# EAGLE board alu4 (EAGLE 9.5.1), part 1 of 2
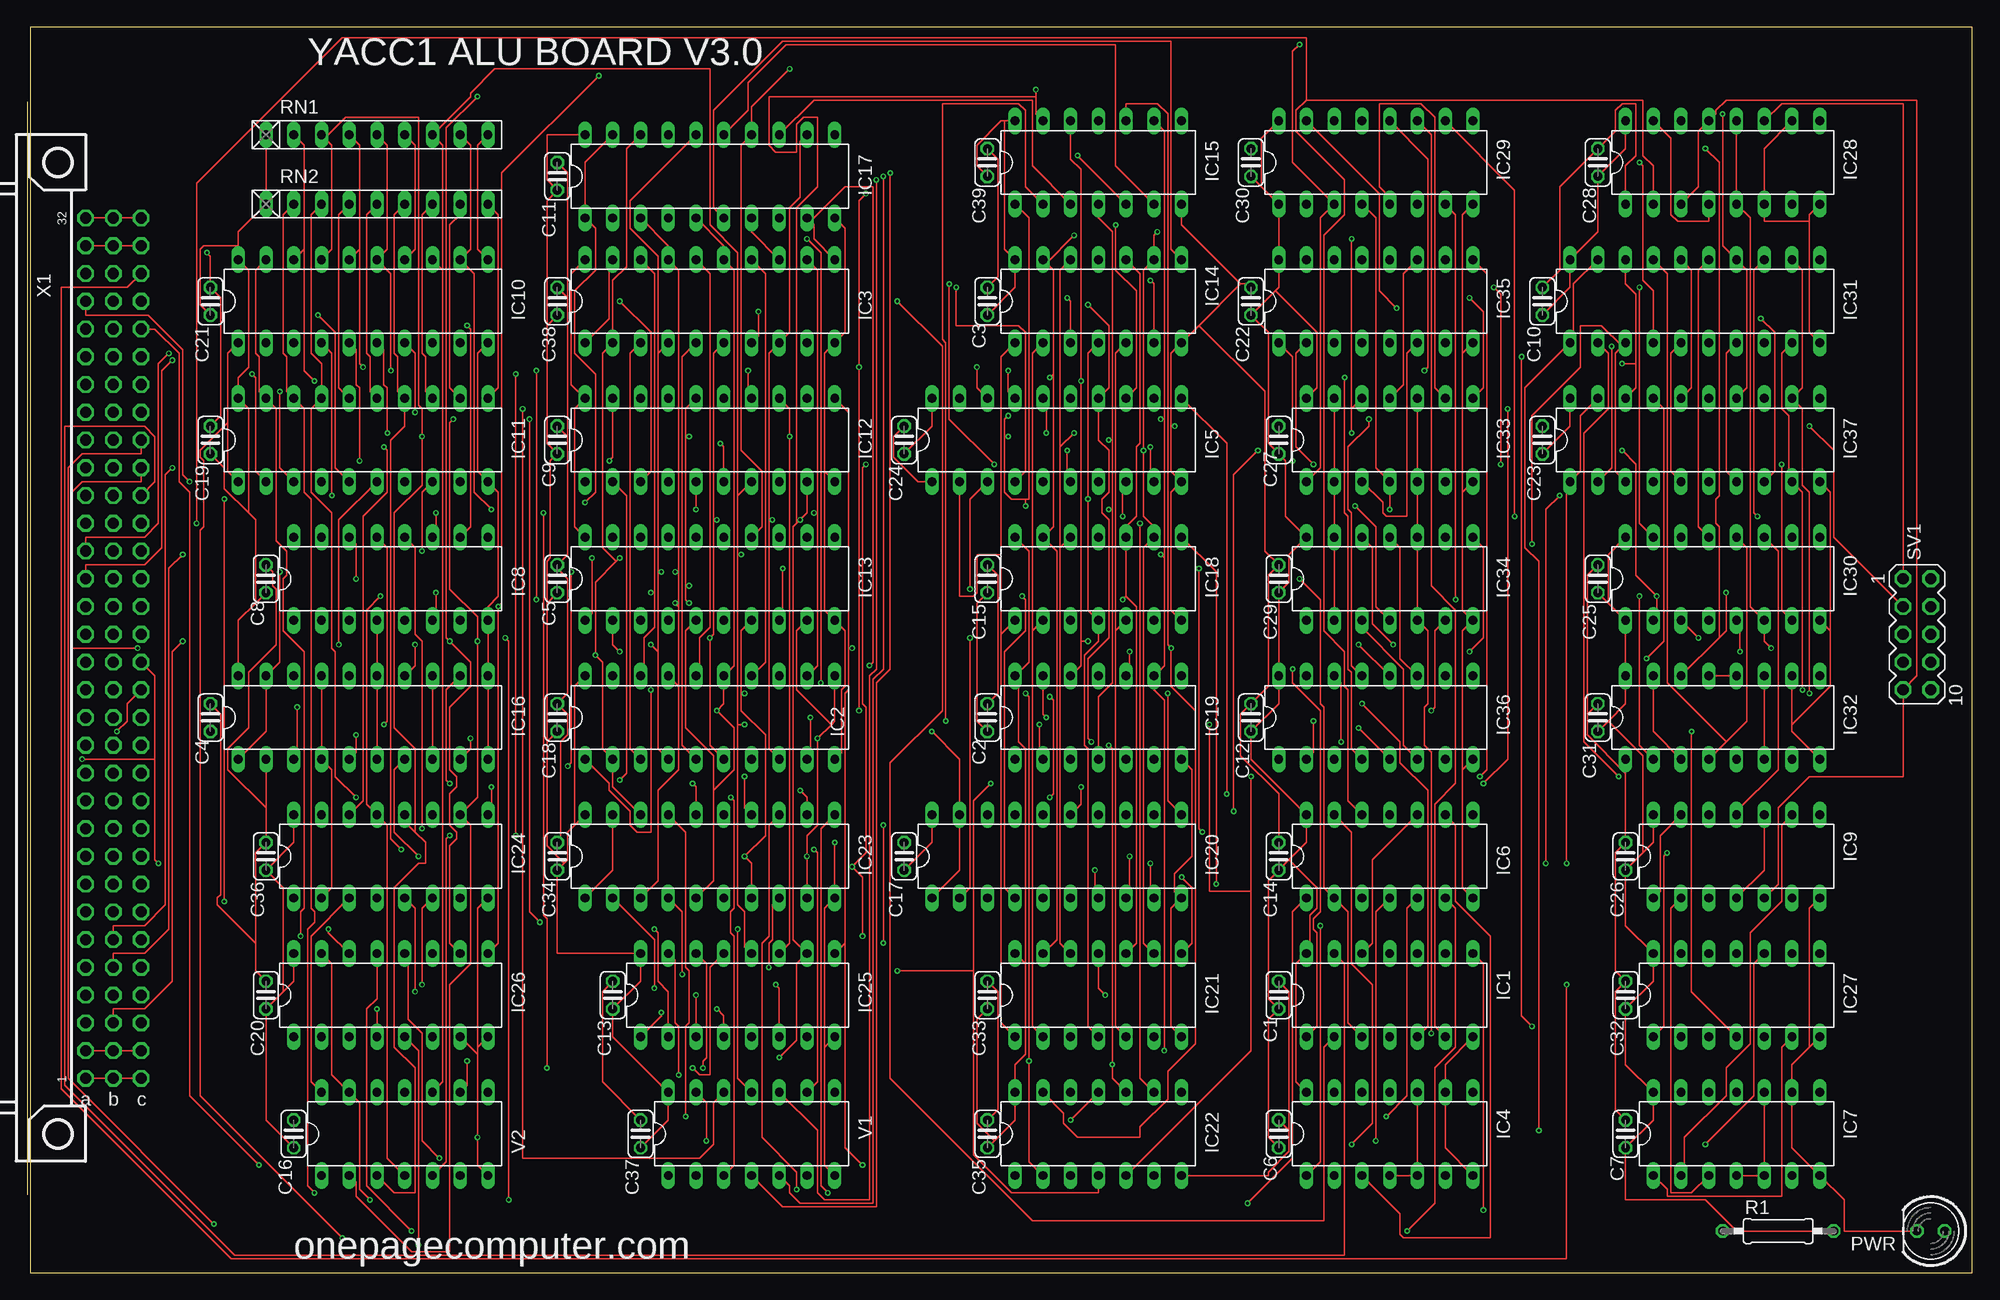
[diagram p0: board, top side]
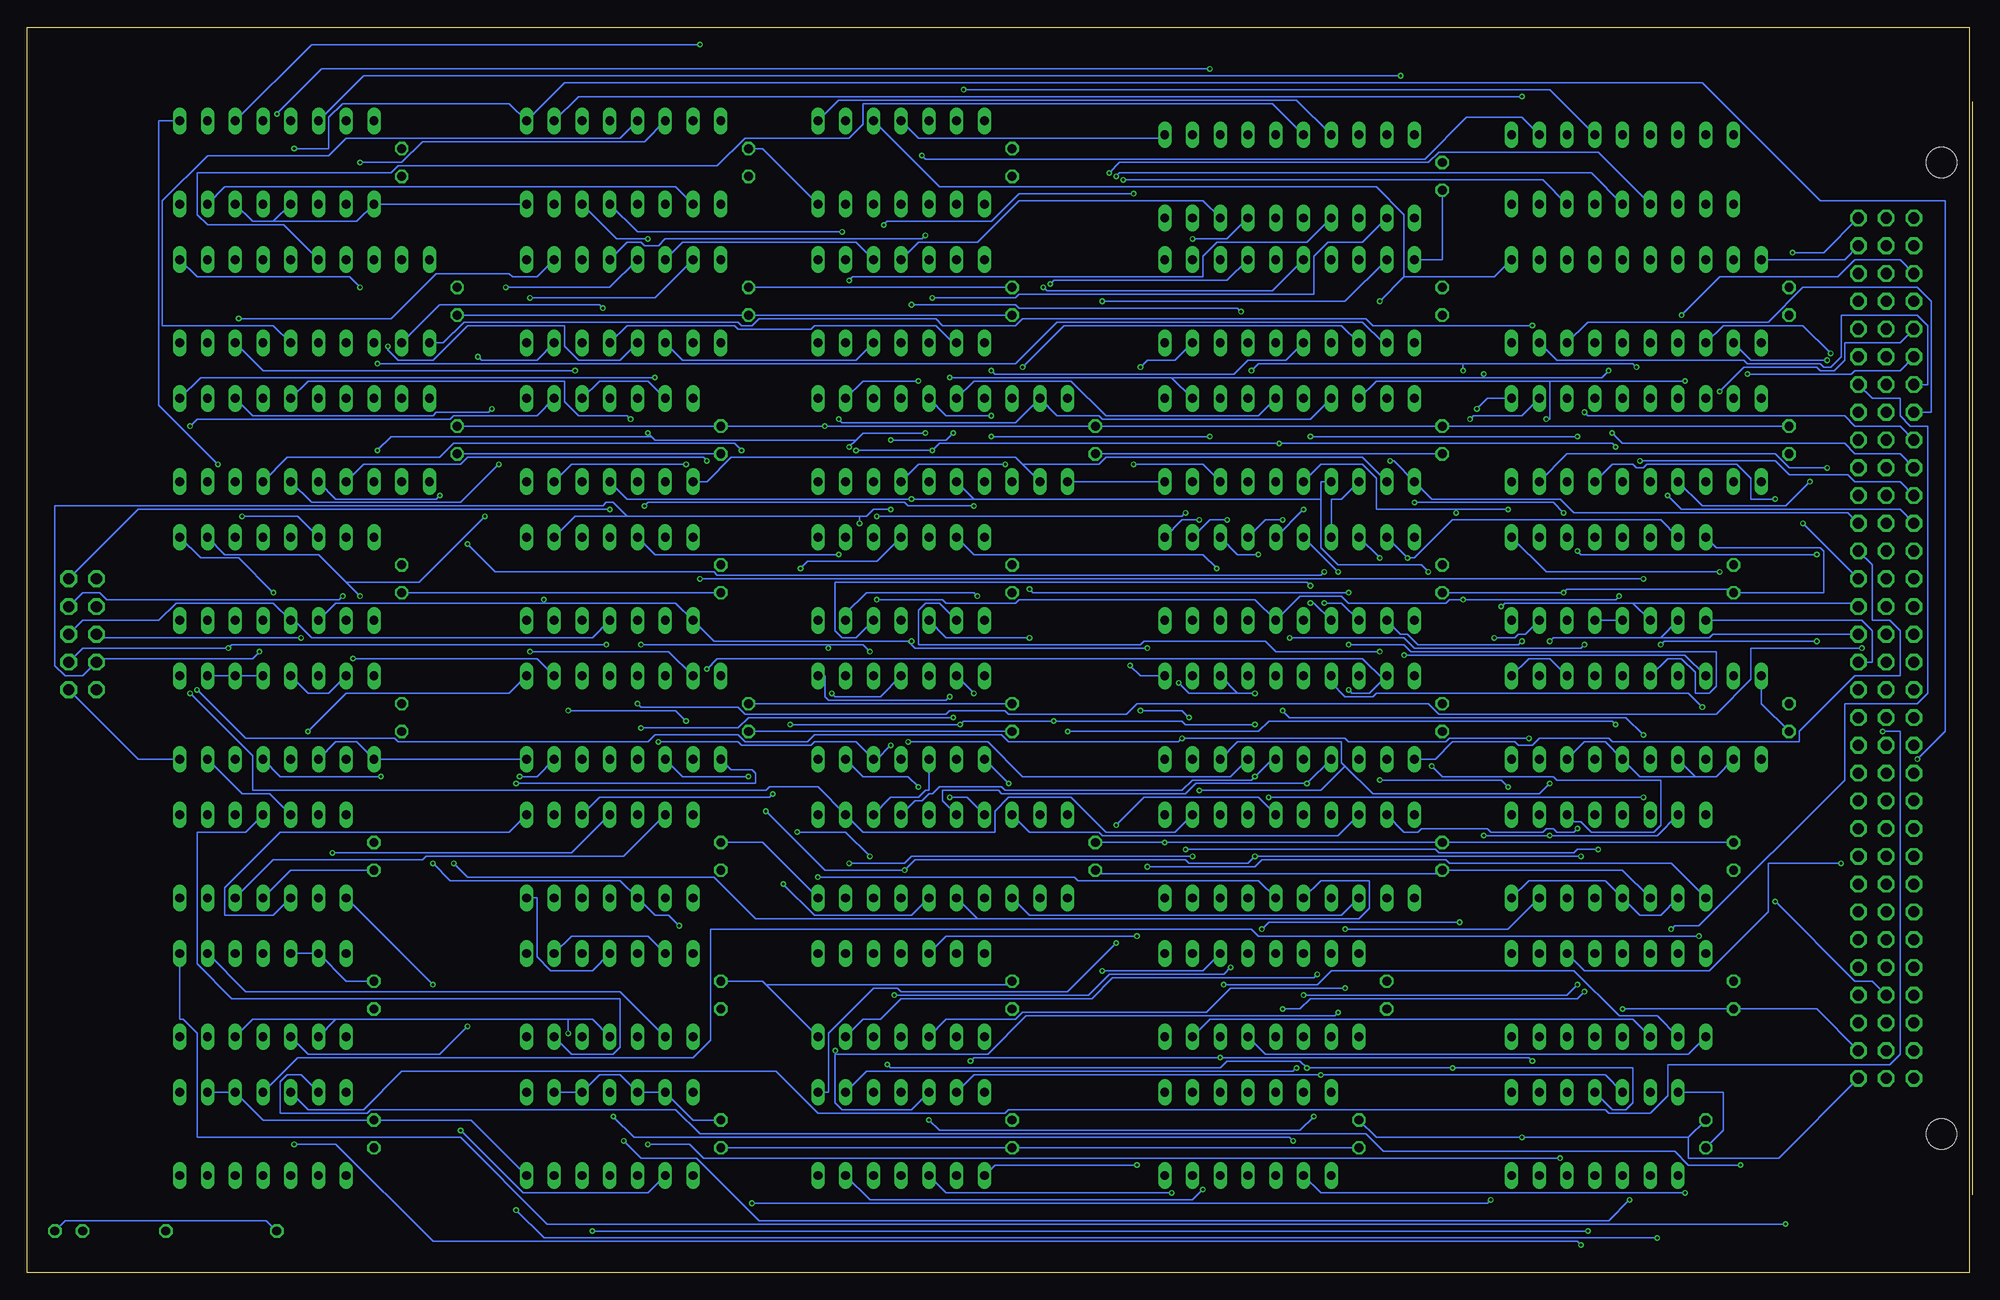
[diagram p1: board, bottom side, seen from below]

Size 177.78 x 113.97 mm. Coordinates in mm from the lower left corner, seen from the top.
Outline: 0,0 177.78,0 177.78,113.97 0,113.97 0,0
Copper layers (1*16): Top 0.035559375mm / dielectric 1.6mm / Bottom 0.035559375mm
Design rules "oshpark-2layer": minimum track width 6mil, minimum drill 10mil, track to track 6mil, track to pad 6mil, pad to pad 6mil, via to via 6mil, smd to smd 6mil, copper to edge 15mil, drill to drill 6mil, minimum pad ring 5mil, minimum via ring 5mil, stop-mask expansion 2.5mil, vias tented up to drill 0mil, thermal gap 10mil

## Footprints (pad centres in the part's own frame; a part is rotated, then mirrored left to right if it is on the bottom)
C025-024X044 = drill 0.813 octagon: 1 -1.27,0; 2 1.27,0
DIL14 = drill 0.813 long: 1 -7.62,-3.81; 2 -5.08,-3.81; 3 -2.54,-3.81; 4 0,-3.81; 5 2.54,-3.81; 6 5.08,-3.81; 7 7.62,-3.81; 8 7.62,3.81; 9 5.08,3.81; 10 2.54,3.81; 11 0,3.81; 12 -2.54,3.81; 13 -5.08,3.81; 14 -7.62,3.81
DIL20 = drill 0.813 long: 1 -11.43,-3.81; 2 -8.89,-3.81; 3 -6.35,-3.81; 4 -3.81,-3.81; 5 -1.27,-3.81; 6 1.27,-3.81; 7 3.81,-3.81; 8 6.35,-3.81; 9 8.89,-3.81; 10 11.43,-3.81; 11 11.43,3.81; 12 8.89,3.81; 13 6.35,3.81; 14 3.81,3.81; 15 1.27,3.81; 16 -1.27,3.81; 17 -3.81,3.81; 18 -6.35,3.81; 19 -8.89,3.81; 20 -11.43,3.81
DIL16 = drill 0.813 long: 1 -8.89,-3.81; 2 -6.35,-3.81; 3 -3.81,-3.81; 4 -1.27,-3.81; 5 1.27,-3.81; 6 3.81,-3.81; 7 6.35,-3.81; 8 8.89,-3.81; 9 8.89,3.81; 10 6.35,3.81; 11 3.81,3.81; 12 1.27,3.81; 13 -1.27,3.81; 14 -3.81,3.81; 15 -6.35,3.81; 16 -8.89,3.81
LED5MM = drill 0.813 octagon: A -1.27,0; K 1.27,0
0207/10 = drill 0.813 octagon: 1 -5.08,0; 2 5.08,0
RN-9 = drill 0.813 long: 1 -10.16,0; 2 -7.62,0; 3 -5.08,0; 4 -2.54,0; 5 0,0; 6 2.54,0; 7 5.08,0; 8 7.62,0; 9 10.16,0
MA05-2 = drill 1.016 octagon: 1 -5.08,-1.27; 2 -5.08,1.27; 3 -2.54,-1.27; 4 -2.54,1.27; 5 0,-1.27; 6 0,1.27; 7 2.54,-1.27; 8 2.54,1.27; 9 5.08,-1.27; 10 5.08,1.27
FABC96R = drill 1.016 octagon: A1 -2.54,39.37; A2 -2.54,36.83; A3 -2.54,34.29; A4 -2.54,31.75; A5 -2.54,29.21; A6 -2.54,26.67; A7 -2.54,24.13; A8 -2.54,21.59; A9 -2.54,19.05; A10 -2.54,16.51; A11 -2.54,13.97; A12 -2.54,11.43; A13 -2.54,8.89; A14 -2.54,6.35; A15 -2.54,3.81; A16 -2.54,1.27; A17 -2.54,-1.27; A18 -2.54,-3.81; A19 -2.54,-6.35; A20 -2.54,-8.89; A21 -2.54,-11.43; A22 -2.54,-13.97; A23 -2.54,-16.51; A24 -2.54,-19.05; A25 -2.54,-21.59; A26 -2.54,-24.13; A27 -2.54,-26.67; A28 -2.54,-29.21; A29 -2.54,-31.75; A30 -2.54,-34.29; A31 -2.54,-36.83; A32 -2.54,-39.37; B1 -5.08,39.37; B2 -5.08,36.83; B3 -5.08,34.29; B4 -5.08,31.75; B5 -5.08,29.21; B6 -5.08,26.67; B7 -5.08,24.13; B8 -5.08,21.59; B9 -5.08,19.05; B10 -5.08,16.51; B11 -5.08,13.97; B12 -5.08,11.43; B13 -5.08,8.89; B14 -5.08,6.35; B15 -5.08,3.81; B16 -5.08,1.27; B17 -5.08,-1.27; B18 -5.08,-3.81; B19 -5.08,-6.35; B20 -5.08,-8.89; B21 -5.08,-11.43; B22 -5.08,-13.97; B23 -5.08,-16.51; B24 -5.08,-19.05; B25 -5.08,-21.59; B26 -5.08,-24.13; B27 -5.08,-26.67; B28 -5.08,-29.21; B29 -5.08,-31.75; B30 -5.08,-34.29; B31 -5.08,-36.83; B32 -5.08,-39.37; C1 -7.62,39.37; C2 -7.62,36.83; C3 -7.62,34.29; C4 -7.62,31.75; C5 -7.62,29.21; C6 -7.62,26.67; C7 -7.62,24.13; C8 -7.62,21.59; C9 -7.62,19.05; C10 -7.62,16.51; C11 -7.62,13.97; C12 -7.62,11.43; C13 -7.62,8.89; C14 -7.62,6.35; C15 -7.62,3.81; C16 -7.62,1.27; C17 -7.62,-1.27; C18 -7.62,-3.81; C19 -7.62,-6.35; C20 -7.62,-8.89; C21 -7.62,-11.43; C22 -7.62,-13.97; C23 -7.62,-16.51; C24 -7.62,-19.05; C25 -7.62,-21.59; C26 -7.62,-24.13; C27 -7.62,-26.67; C28 -7.62,-29.21; C29 -7.62,-31.75; C30 -7.62,-34.29; C31 -7.62,-36.83; C32 -7.62,-39.37 | hole 2.794: 0,-44.456; 0,44.456

## Placement (x,y rotation side)
C1  .1uf  [C025-024X044]  114.3,25.4 90 top
C2  .1uf  [C025-024X044]  87.63,50.8 90 top
C3  .1uf  [C025-024X044]  87.63,88.9 90 top
C4  .1uf  [C025-024X044]  16.51,50.8 90 top
C5  .1uf  [C025-024X044]  48.26,63.5 90 top
C6  .1uf  [C025-024X044]  114.3,12.7 90 top
C7  .1uf  [C025-024X044]  146.05,12.7 90 top
C8  .1uf  [C025-024X044]  21.59,63.5 90 top
C9  .1uf  [C025-024X044]  48.26,76.2 90 top
C10  .1uf  [C025-024X044]  138.43,88.9 90 top
C11  .1uf  [C025-024X044]  48.26,100.33 90 top
C12  .1uf  [C025-024X044]  111.76,50.8 90 top
C13  .1uf  [C025-024X044]  53.34,25.4 90 top
C14  .1uf  [C025-024X044]  114.3,38.1 90 top
C15  .1uf  [C025-024X044]  87.63,63.5 90 top
C16  .1uf  [C025-024X044]  24.13,12.7 90 top
C17  .1uf  [C025-024X044]  80.01,38.1 90 top
C18  .1uf  [C025-024X044]  48.26,50.8 90 top
C19  .1uf  [C025-024X044]  16.51,76.2 90 top
C20  .1uf  [C025-024X044]  21.59,25.4 90 top
C21  ,1uf  [C025-024X044]  16.51,88.9 90 top
C22  .1uf  [C025-024X044]  111.76,88.9 90 top
C23  .1uf  [C025-024X044]  138.43,76.2 90 top
C24  .1uf  [C025-024X044]  80.01,76.2 90 top
C25  .1uf  [C025-024X044]  143.51,63.5 90 top
C26  .1uf  [C025-024X044]  146.05,38.1 90 top
C27  .1uf  [C025-024X044]  114.3,76.2 90 top
C28  .1uf  [C025-024X044]  143.51,101.6 90 top
C29  .1uf  [C025-024X044]  114.3,63.5 90 top
C30  .1uf  [C025-024X044]  111.76,101.6 90 top
C31  .1uf  [C025-024X044]  143.51,50.8 90 top
C32  .1uf  [C025-024X044]  146.05,25.4 90 top
C33  .1uf  [C025-024X044]  87.63,25.4 90 top
C34  .1uf  [C025-024X044]  48.26,38.1 90 top
C35  .1uf  [C025-024X044]  87.63,12.7 90 top
C36  .1uf  [C025-024X044]  21.59,38.1 90 top
C37  .1uf  [C025-024X044]  55.88,12.7 90 top
C38  .1uf  [C025-024X044]  48.26,88.9 90 top
C39  .1uf  [C025-024X044]  87.63,101.6 90 top
IC1  74ALS04N  [DIL14]  124.46,25.4 0 top
IC2  74LS240N  [DIL20]  62.23,50.8 0 top
IC3  74LS244N  [DIL20]  62.23,88.9 0 top
IC4  74LS00N  [DIL14]  124.46,12.7 0 top
IC5  74LS374N  [DIL20]  93.98,76.2 0 top
IC6  74ALS08N  [DIL14]  124.46,38.1 0 top
IC7  74LS32N  [DIL14]  156.21,12.7 0 top
IC8  74LS138N  [DIL16]  33.02,63.5 0 top
IC9  74LS74N  [DIL14]  156.21,38.1 0 top
IC10  74LS245N  [DIL20]  30.48,88.9 0 top
IC11  74LS245N  [DIL20]  30.48,76.2 0 top
IC12  74LS244N  [DIL20]  62.23,76.2 0 top
IC13  74LS244N  [DIL20]  62.23,63.5 0 top
IC14  74LS86N  [DIL14]  97.79,88.9 0 top
IC15  74LS86N  [DIL14]  97.79,101.6 0 top
IC16  74LS244N  [DIL20]  30.48,50.8 0 top
IC17  74LS244N  [DIL20]  62.23,100.33 0 top
IC18  74LS08N  [DIL14]  97.79,63.5 0 top
IC19  74LS08N  [DIL14]  97.79,50.8 0 top
IC20  74LS244N  [DIL20]  93.98,38.1 0 top
IC21  74LS32N  [DIL14]  97.79,25.4 0 top
IC22  74LS32N  [DIL14]  97.79,12.7 0 top
IC23  74LS244N  [DIL20]  62.23,38.1 0 top
IC24  74LS85N  [DIL16]  33.02,38.1 0 top
IC25  74LS85N  [DIL16]  64.77,25.4 0 top
IC26  74LS251N  [DIL16]  33.02,25.4 0 top
IC27  74LS86N  [DIL14]  156.21,25.4 0 top
IC28  74LS153N  [DIL16]  154.94,101.6 0 top
IC29  74LS194N  [DIL16]  123.19,101.6 0 top
IC30  74LS194N  [DIL16]  154.94,63.5 0 top
IC31  74LS244N  [DIL20]  152.4,88.9 0 top
IC32  74LS153N  [DIL16]  154.94,50.8 0 top
IC33  74LS86N  [DIL14]  124.46,76.2 0 top
IC34  74LS86N  [DIL14]  124.46,63.5 0 top
IC35  74LS283N  [DIL16]  123.19,88.9 0 top
IC36  74LS283N  [DIL16]  123.19,50.8 0 top
IC37  74LS244N  [DIL20]  152.4,76.2 0 top
PWR  [LED5MM]  173.99,3.81 180 top
R1  330  [0207/10]  160.02,3.81 0 top
RN1  10k  [RN-9]  31.75,104.14 0 top
RN2  10k  [RN-9]  31.75,97.79 0 top
SV1  [MA05-2]  172.72,58.42 270 top
V1  744078N  [DIL14]  66.04,12.7 0 top
V2  744078N  [DIL14]  34.29,12.7 0 top
X1  FABC96R  [FABC96R]  2.54,57.15 180 top

## Library data of the parts
C1-C39 = rcl
IC1-IC37 = 74xx-us
PWR = led
R1 = eagle-ltspice; SPICEMODEL: NONE; SPICEPREFIX: R
RN1 RN2 = resistor-net; OC_FARNELL: unknown; OC_NEWARK: unknown
SV1 = con-lstb; OC_FARNELL: unknown; OC_NEWARK: unknown
V1 V2 = 74ttl-din
X1 = con-vg

## Nets
-AC-LD: IC1.9 IC1.13 X1.C22
-AC-LD-INV: IC1.1 IC2.1 IC2.19 X1.C20
-AC-RD: IC12.1 IC12.19 X1.C21
-ADD: IC6.1 IC8.7
-ADD/SUB: IC4.1 IC6.3 IC37.1 IC37.19
-ADDR-REG-LD0: X1.C4
-ADDR-REG-LD1: X1.C6
-ADDR-REG-RD0: X1.C3
-ADDR-REG-RD1: X1.C5
-ALU-FUNC: IC7.12 X1.C15
-ALU-IO-EN: IC7.11 IC10.19 IC11.19
-AND: IC8.13 IC20.1 IC20.19
-BUS-EN: IC7.13 X1.C28
-BUS-OUT: IC1.8 IC10.1 IC11.1
-DATA: IC8.15 IC13.1 IC13.19
-HL-SWAP: X1.C25
-IN: IC26.14 X1.C26
-INT: X1.C13
-INTA: X1.C14
-IO-ADDR-LD: X1.C11
-IO-RD: X1.B25
-IO-WR: X1.B26
-MEM-RD: X1.B23
-MEM-WR: X1.B24
-OR: IC8.12 IC23.1 IC23.19
-OUT: X1.C27
-REG-DN: X1.B21
-REG-FUNC-LD: X1.B8
-REG-FUNC-RD: X1.B7
-REG-LD-HI: X1.B20
-REG-LD-LO: X1.B18
-REG-RD-HI: X1.B19
-REG-RD-LO: X1.B17
-REG-UP: X1.B22
-RESET: IC9.1 IC9.13 X1.C30
-RUN: X1.C29
-SHIFT: IC4.2 IC8.10 IC31.1 IC31.19
-SR-LD: IC1.5 X1.C23
-SUB: IC1.3 IC6.2 IC8.14
-TMP-REG-LD0: X1.B28
-TMP-REG-LD1: X1.B30
-TMP-REG-RD0: X1.B27
-TMP-REG-RD1: X1.B29
-XOR: IC8.11 IC17.1 IC17.19
-ZERO: IC8.9 IC16.1 IC16.19
AC-LD: IC1.12 IC5.11 IC6.10
AC-LD-INV: IC1.2 IC3.1 IC3.19 IC27.9
ACI-DATA0: IC2.18 IC3.18 IC5.3
ACI-DATA1: IC2.16 IC3.16 IC5.4
ACI-DATA2: IC2.14 IC3.14 IC5.7
ACI-DATA3: IC2.12 IC3.12 IC5.8
ACI-DATA4: IC2.9 IC3.9 IC5.13
ACI-DATA5: IC2.7 IC3.7 IC5.14
ACI-DATA6: IC2.5 IC3.5 IC5.17
ACI-DATA7: IC2.3 IC3.3 IC5.18
ACO-DATA0: IC5.2 IC12.2 IC14.1 IC18.1 IC21.1 IC24.9 IC28.11 IC29.3 IC33.1 SV1.1
ACO-DATA1: IC5.5 IC12.4 IC14.4 IC18.4 IC21.4 IC24.11 IC29.4 IC33.4 SV1.2
ACO-DATA2: IC5.6 IC12.6 IC14.9 IC18.9 IC21.9 IC24.14 IC29.5 IC33.9 SV1.3
ACO-DATA3: IC5.9 IC12.8 IC14.12 IC18.12 IC21.12 IC24.1 IC29.6 IC30.2 IC33.12 SV1.4
ACO-DATA4: IC5.12 IC12.11 IC15.12 IC19.12 IC22.1 IC25.9 IC29.7 IC30.3 IC34.1 SV1.5
ACO-DATA5: IC5.15 IC12.13 IC15.1 IC19.1 IC22.4 IC25.11 IC30.4 IC34.4 SV1.6
ACO-DATA6: IC5.16 IC12.15 IC15.4 IC19.4 IC22.9 IC25.14 IC30.5 IC34.9 SV1.7
ACO-DATA7: IC5.19 IC12.17 IC15.9 IC19.9 IC22.12 IC25.1 IC28.5 IC28.12 IC30.6 IC34.12 SV1.8
ADDR0: X1.A3
ADDR1: X1.A4
ADDR2: X1.A5
ADDR3: X1.A6
ADDR4: X1.A7
ADDR5: X1.A8
ADDR6: X1.A9
ADDR7: X1.A10
ADDR8: X1.A11
ADDR9: X1.A12
ADDR10: X1.A13
ADDR11: X1.A14
ADDR12: X1.A15
ADDR13: X1.A16
ADDR14: X1.A17
ADDR15: X1.A18
ALU0: IC8.1 IC26.11 IC29.9 IC30.9 IC32.14 X1.C16
ALU1: IC8.2 IC26.10 IC29.10 IC30.10 IC32.2 X1.C17
ALU2: IC8.3 IC26.9 IC28.14 X1.C18
ALU3: IC6.12 IC28.2 X1.C19
BDATA0: IC10.18 IC12.18 IC13.2 IC14.2 IC18.2 IC21.2 IC24.10 IC35.5 RN1.2 V2.2
BDATA1: IC10.17 IC12.16 IC13.4 IC14.5 IC18.5 IC21.5 IC24.12 IC35.3 RN1.3 V2.3
BDATA2: IC10.16 IC12.14 IC13.6 IC14.10 IC18.10 IC21.10 IC24.13 IC35.14 RN1.4 V2.4
BDATA3: IC10.15 IC12.12 IC13.8 IC14.13 IC18.13 IC21.13 IC24.15 IC35.12 RN1.5 V2.5
BDATA4: IC10.14 IC12.9 IC13.11 IC15.13 IC19.13 IC22.2 IC25.10 IC36.5 RN1.6 V2.9
BDATA5: IC10.13 IC12.7 IC13.13 IC15.2 IC19.2 IC22.5 IC25.12 IC36.3 RN1.7 V2.10
BDATA6: IC10.12 IC12.5 IC13.15 IC15.5 IC19.5 IC22.10 IC25.13 IC36.14 RN1.8 V2.11
BDATA7: IC10.11 IC12.3 IC13.17 IC15.10 IC19.10 IC22.13 IC25.15 IC36.12 RN1.9 V2.12
BDATA8: IC11.18 RN2.2 V1.2
BDATA9: IC11.17 RN2.3 V1.3
BDATA10: IC11.16 RN2.4 V1.4
BDATA11: IC11.15 RN2.5 V1.5
BDATA12: IC11.14 RN2.6 V1.9
BDATA13: IC11.13 RN2.7 V1.10
BDATA14: IC11.12 RN2.8 V1.11
BDATA15: IC11.11 RN2.9 V1.12
BR-COND: IC27.8 X1.C24
C/SHIFT: IC6.13 IC9.5 IC26.12 IC28.3 IC28.13 SV1.9
CO/BO: IC7.1 IC27.6
DATA0: IC10.2 X1.A19
DATA1: IC10.3 X1.A20
DATA2: IC10.4 X1.A21
DATA3: IC10.5 X1.A22
DATA4: IC10.6 X1.A23
DATA5: IC10.7 X1.A24
DATA6: IC10.8 X1.A25
DATA7: IC10.9 X1.A26
DATA8: IC11.2 X1.A27
DATA9: IC11.3 X1.A28
DATA10: IC11.4 X1.A29
DATA11: IC11.5 X1.A30
DATA12: IC11.6 X1.B3
DATA13: IC11.7 X1.B4
DATA14: IC11.8 X1.B5
DATA15: IC11.9 X1.B6
GND: C1.2 C2.2 C3.2 C4.2 C5.2 C6.2 C7.2 C8.2 C9.2 C10.2 C11.2 C12.2 C13.2 C14.2 C15.2 C16.2 C17.2 C18.2 C19.2 C20.2 C21.2 C22.2 C23.2 C24.2 C25.2 C26.2 C27.2 C28.2 C29.2 C30.2 C31.2 C32.2 C33.2 C34.2 C35.2 C36.2 C37.2 C38.2 C39.2 IC1.7 IC1.11 IC2.10 IC3.10 IC4.4 IC4.5 IC4.7 IC4.9 IC4.10 IC4.12 IC4.13 IC5.1 IC5.10 IC6.7 IC7.4 IC7.5 IC7.7 IC7.9 IC7.10 IC8.4 IC8.5 IC8.8 IC9.7 IC10.10 IC11.10 IC12.10 IC13.10 IC14.7 IC15.7 IC16.2 IC16.4 IC16.6 IC16.8 IC16.10 IC16.11 IC16.13 IC16.15 IC16.17 IC17.10 IC18.7 IC19.7 IC20.10 IC21.7 IC22.7 IC23.10 IC24.2 IC24.4 IC24.8 IC25.8 IC26.7 IC26.8 IC27.7 IC27.12 IC27.13 IC28.1 IC28.4 IC28.6 IC28.8 IC28.10 IC28.15 IC29.8 IC30.8 IC31.10 IC32.1 IC32.3 IC32.6 IC32.8 IC32.10 IC32.11 IC32.12 IC32.13 IC32.15 IC33.7 IC34.7 IC35.8 IC36.8 IC37.10 PWR.K SV1.10 V1.7 V2.7 X1.A1 X1.A32 X1.B1 X1.B32 X1.C1 X1.C32
INV-IN0: IC2.2 IC3.2 IC13.18 IC16.18 IC17.18 IC20.18 IC23.18 IC31.18 IC37.18
INV-IN1: IC2.4 IC3.4 IC13.16 IC16.16 IC17.16 IC20.16 IC23.16 IC31.16 IC37.16
INV-IN2: IC2.6 IC3.6 IC13.14 IC16.14 IC17.14 IC20.14 IC23.14 IC31.14 IC37.14
INV-IN3: IC2.8 IC3.8 IC13.12 IC16.12 IC17.12 IC20.12 IC23.12 IC31.12 IC37.12
INV-IN4: IC2.11 IC3.11 IC13.9 IC16.9 IC17.9 IC20.9 IC23.9 IC31.9 IC37.9
INV-IN5: IC2.13 IC3.13 IC13.7 IC16.7 IC17.7 IC20.7 IC23.7 IC31.7 IC37.7
INV-IN6: IC2.15 IC3.15 IC13.5 IC16.5 IC17.5 IC20.5 IC23.5 IC31.5 IC37.5
INV-IN7: IC2.17 IC3.17 IC13.3 IC16.3 IC17.3 IC20.3 IC23.3 IC31.3 IC37.3
IO-ADDR0: X1.C7
IO-ADDR1: X1.C8
IO-ADDR2: X1.C9
IO-ADDR3: X1.C10
N$1: IC27.4 IC36.9
N$2: IC27.3 IC35.7
N$3: IC4.3 IC6.9
N$5: IC6.8 IC9.3
N$6: IC6.4 IC26.15 V2.13
N$7: IC7.3 IC9.2
N$8: IC6.11 IC27.1
N$11: IC9.12 IC32.7
N$12: IC33.6 IC35.2
N$13: IC34.6 IC36.2
N$14: PWR.A R1.1
N$26: IC33.8 IC35.15
N$27: IC33.11 IC35.11
N$28: IC33.3 IC35.6
N$29: IC34.3 IC36.6
N$31: IC34.8 IC36.15
N$32: IC34.11 IC36.11
N$33: IC35.4 IC37.2
N$34: IC35.1 IC37.4
N$35: IC35.13 IC37.6
N$36: IC35.10 IC37.8
N$37: IC36.4 IC37.11
N$38: IC36.1 IC37.13
N$39: IC36.13 IC37.15
N$40: IC36.10 IC37.17
N$41: IC35.9 IC36.7
N$43: IC24.5 IC25.4
N$45: IC24.6 IC25.3
N$46: IC24.7 IC25.2
N$47: IC25.7 IC26.3
N$48: IC25.6 IC26.2
N$49: IC25.5 IC26.1
N$52: IC6.5 V1.13
N$55: IC6.6 IC26.13
N$56: IC26.5 IC27.10
N$57: IC29.15 IC31.2 IC32.5
N$66: IC29.14 IC31.4
N$69: IC29.13 IC31.6
N$70: IC29.12 IC31.8
N$71: IC30.15 IC31.11
N$72: IC30.14 IC31.13
N$73: IC30.13 IC31.15
N$74: IC30.12 IC31.17 IC32.4
N$75: IC28.7 IC29.2
N$76: IC28.9 IC30.7
N$77: IC21.3 IC23.2
N$78: IC21.6 IC23.4
N$79: IC21.8 IC23.6
N$81: IC21.11 IC23.8
N$82: IC22.3 IC23.11
N$83: IC22.6 IC23.13
N$84: IC22.8 IC23.15
N$85: IC22.11 IC23.17
N$86: IC18.3 IC20.2
N$87: IC18.6 IC20.4
N$88: IC18.8 IC20.6
N$89: IC18.11 IC20.8
N$90: IC19.11 IC20.11
N$91: IC19.3 IC20.13
N$92: IC19.6 IC20.15
N$93: IC19.8 IC20.17
N$94: IC14.3 IC17.2
N$95: IC14.6 IC17.4
N$96: IC14.8 IC17.6
N$97: IC14.11 IC17.8
N$98: IC15.11 IC17.11
N$99: IC15.3 IC17.13
N$100: IC15.6 IC17.15
N$101: IC15.8 IC17.17
REG-LD-ID0: X1.B13
REG-LD-ID1: X1.B14
REG-LD-ID2: X1.B15
REG-LD-ID3: X1.B16
REG-RD-ID0: X1.B9
REG-RD-ID1: X1.B10
REG-RD-ID2: X1.B11
REG-RD-ID3: X1.B12
SHIFT-OUT: IC7.2 IC9.9
SR-LD: IC1.6 IC9.11 IC29.11 IC30.11
SUB: IC1.4 IC27.2 IC27.5 IC33.2 IC33.5 IC33.10 IC33.13 IC34.2 IC34.5 IC34.10 IC34.13
UNUSED0: X1.C12
VCC: C1.1 C2.1 C3.1 C4.1 C5.1 C6.1 C7.1 C8.1 C9.1 C10.1 C11.1 C12.1 C13.1 C14.1 C15.1 C16.1 C17.1 C18.1 C19.1 C20.1 C21.1 C22.1 C23.1 C24.1 C25.1 C26.1 C27.1 C28.1 C29.1 C30.1 C31.1 C32.1 C33.1 C34.1 C35.1 C36.1 C37.1 C38.1 C39.1 IC1.14 IC2.20 IC3.20 IC4.14 IC5.20 IC6.14 IC7.14 IC8.6 IC8.16 IC9.4 IC9.10 IC9.14 IC10.20 IC11.20 IC12.20 IC13.20 IC14.14 IC15.14 IC16.20 IC17.20 IC18.14 IC19.14 IC20.20 IC21.14 IC22.14 IC23.20 IC24.3 IC24.16 IC25.16 IC26.4 IC26.16 IC27.14 IC28.16 IC29.1 IC29.16 IC30.1 IC30.16 IC31.20 IC32.16 IC33.14 IC34.14 IC35.16 IC36.16 IC37.20 R1.2 RN1.1 RN2.1 V1.14 V2.14 X1.A2 X1.A31 X1.B2 X1.B31 X1.C2 X1.C31

## Tracks (layer width: path | path; a pad name or v marks a point on that pad's centre or on a via)
-AC-LD
  Top 0.152: X1.C22 11.43,72.39 11.43,76.52 10.48,77.47 3.17,77.47 3.17,17.14 18.73,1.59 120.33,1.59 120.33,28.26 IC1.13
  Bottom 0.152: IC1.13 120.97,30.8 127.95,30.8 IC1.9
-AC-LD-INV  (via drill 0.25)
  Top 0.152: IC2.1 53.02,44.77 53.02,44.13 54.93,42.23 54.93,40.96 55.56,40.32 56.83,40.32 v56.83,53.34 | IC1.1 117.79,22.54 117.79,31.11 117.47,31.43 117.47,32.38 118.11,33.02 118.11,51.44 115.57,53.98 v115.57,55.24
  Bottom 0.152: v56.83,53.34 56.52,53.02 54.93,53.02 53.66,54.29 | v115.57,55.24 114.62,56.2 55.56,56.2 53.66,54.29 | 53.66,54.29 IC2.19 | X1.C20 8.89,64.77 8.89,59.69 7.3,59.69 6.35,58.74 6.35,54.61 10.48,54.61 15.56,49.53 15.56,48.58 32.7,48.58 33.02,48.9 39.37,48.9 40.01,48.26 41.27,48.26 41.59,48.58 47.31,48.58 48.9,46.99 IC2.1
-AC-RD  (via drill 0.25)
  Top 0.152: v53.02,74.3 53.34,74.61 IC12.19
  Bottom 0.152: v53.02,74.3 52.7,74.3 IC12.1 49.21,70.8 37.47,70.8 36.2,69.53 11.11,69.53 X1.C21
-ADD  (via drill 0.25)
  Top 0.152: v43.5,58.1 43.81,57.78 v43.81,6.67 | v111.44,6.35 115.57,10.48 115.57,33.02 IC6.1
  Bottom 0.152: IC8.7 40.64,58.42 41.27,58.42 41.59,58.1 v43.5,58.1 | v43.81,6.67 44.13,6.35 v111.44,6.35
-ADD/SUB  (via drill 0.25)
  Top 0.152: IC37.19 141.92,78.42 141.92,73.34 IC37.1 140.65,72.07 v140.65,37.47 | IC4.1 118.11,10.16 v118.11,31.75
  Bottom 0.152: v118.11,31.75 119.06,32.7 120.33,32.7 IC6.3 123.51,35.88 139.06,35.88 v140.65,37.47
-ALU-FUNC  (via drill 0.25)
  Top 0.152: v7.94,49.53 8.89,50.48 8.89,52.07 X1.C15
  Bottom 0.152: IC7.12 152.08,14.92 147,14.92 143.51,18.41 109.22,18.41 105.41,14.61 88.27,14.61 87.95,14.92 33.34,14.92 33.02,14.61 29.21,14.61 27.62,16.19 27.62,19.05 7.3,19.05 6.35,20 6.35,49.53 v7.94,49.53
-ALU-IO-EN  (via drill 0.25)
  Top 0.152: IC10.19 20.64,91.76 20.64,84.14 20.95,83.82 20.95,80.64 IC11.19 22.54,79.06 22.54,66.99 23.5,66.04 23.5,63.82 23.18,63.5 23.18,58.74 25.08,56.83 25.08,33.34 24.77,33.02 v24.77,30.8
  Bottom 0.152: IC7.11 153.03,19.68 116.84,19.68 115.25,21.27 115.25,31.43 65.72,31.43 65.09,30.8 v24.77,30.8
-AND  (via drill 0.25)
  Top 0.152: IC8.13 32.7,66.36 32.7,50.48 v32.38,50.16 | v82.55,49.53 85.09,46.99 IC20.19 85.09,36.83 IC20.1
  Bottom 0.152: v32.38,50.16 32.7,50.48 64.14,50.48 65.09,49.53 v82.55,49.53
-BUS-EN  (via drill 0.25)
  Top 0.152: v20.95,9.84 14.61,16.19 14.61,71.44 13.65,72.39 13.65,84.14 11.43,86.36 X1.C28
  Bottom 0.152: IC7.13 152.72,18.1 153.99,18.1 154.62,17.46 154.62,14.61 146.69,14.61 146.37,14.92 118.43,14.92 116.2,12.7 55.24,12.7 53.66,11.11 26.99,11.11 25.72,9.84 v20.95,9.84
-BUS-OUT  (via drill 0.25)
  Top 0.152: IC11.1 18.1,73.34 18.1,77.79 | 18.1,77.79 18.1,84.14 IC10.1 | IC1.8 133.03,28.26 v133.03,5.71 | v28.57,3.17 15.56,16.19 15.56,67.94 15.88,68.26 15.88,74.3 15.56,74.61 15.56,75.25 18.1,77.79
  Bottom 0.152: v133.03,5.71 130.49,3.17 v28.57,3.17
-DATA  (via drill 0.25)
  Top 0.152: IC13.1 51.44,60.33 v51.44,65.41
  Bottom 0.152: IC13.19 v51.44,65.41 50.8,65.41 47.31,68.9 28.26,68.9 IC8.15
-IN  (via drill 0.25)
  Top 0.152: IC26.14 27.3,31.11 v27.3,31.43
  Bottom 0.152: v27.3,31.43 26.99,31.75 24.77,31.75 11.43,45.09 11.43,52.07 4.76,52.07 3.81,53.02 3.81,77.47 5.4,77.47 6.35,78.42 6.35,80.01 8.89,80.01 X1.C26
-OR  (via drill 0.25)
  Top 0.152: IC23.1 53.34,36.83 IC23.19 | IC8.12 35.24,66.36 35.24,58.42 35.88,57.78 v35.88,40.64
  Bottom 0.152: v35.88,40.64 36.2,40.32 37.78,40.32 38.1,40.64 38.73,40.64 39.05,40.32 43.81,40.32 44.13,40.64 50.16,40.64 50.48,40.32 51.75,40.32 IC23.19
-RESET  (via drill 0.25)
  Top 0.152: IC9.1 149.22,34.92 149.22,40.01 IC9.13 | X1.C30 8.89,90.17 2.86,90.17 2.86,16.83 18.41,1.27 140.65,1.27 v140.65,26.35
  Bottom 0.152: IC9.1 v140.65,26.35
-SHIFT  (via drill 0.25)
  Top 0.152: IC8.10 40.32,68.26 40.32,86.36 v40.01,86.68 | v138.11,13.02 138.11,65.09 136.84,66.36 136.84,80.96 IC31.1 141.29,85.41 141.29,90.49 IC31.19
  Bottom 0.152: v40.01,86.68 54.61,86.68 55.24,87.31 86.68,87.31 87.31,86.68 93.98,86.68 94.61,87.31 110.81,87.31 111.44,86.68 112.39,86.68 112.71,87 137.79,87 139.7,85.09 IC31.1 | IC4.2 120.97,7.3 132.4,7.3 v138.11,13.02
-SR-LD  (via drill 0.25)
  Top 0.152: IC1.5 127.95,22.54 127.95,44.13 125.41,46.67 125.41,48.58 v121.92,52.07 | v9.84,57.15 3.81,57.15 3.81,71.44 4.76,72.39 10.16,72.39 X1.C23
  Bottom 0.152: v121.92,52.07 121.6,51.75 112.71,51.75 112.08,51.12 93.66,51.12 93.34,51.44 88.27,51.44 87.95,51.12 77.15,51.12 76.2,52.07 49.53,52.07 48.58,51.12 23.18,51.12 20,54.29 20,57.15 v9.84,57.15
-SUB  (via drill 0.25)
  Top 0.152: IC8.14 29.84,66.67 v29.84,63.5 | v116.2,63.5 118.11,61.59 118.11,52.07 118.43,51.75 118.43,35.24 IC6.2 120.65,33.02 120.65,22.86 IC1.3
  Bottom 0.152: v116.2,63.5 v29.84,63.5
-XOR  (via drill 0.25)
  Top 0.152: IC8.11 37.15,67.63 v37.15,69.53 | v50.8,70.48 51.75,71.44 51.75,82.23 49.85,84.14 49.85,89.85 51.75,91.76 51.75,95.57 IC17.1 50.8,101.6 IC17.19
  Bottom 0.152: v37.15,69.53 38.1,70.48 v50.8,70.48
-ZERO  (via drill 0.25)
  Top 0.152: IC16.1 21.59,49.53 IC16.19 22.86,55.88 v22.86,64.14
  Bottom 0.152: IC8.9 38.73,64.14 v22.86,64.14
AC-LD  (via drill 0.25)
  Top 0.152: IC1.12 122.87,30.16 122.87,37.78 IC6.10 | IC5.11 109.54,75.88 v109.54,43.81
  Bottom 0.152: v109.54,43.81 109.86,43.5 125.41,43.5 IC6.10
AC-LD-INV  (via drill 0.25)
  Top 0.152: IC3.1 53.02,87.31 53.02,92.39 IC3.19 | v79.38,88.9 83.5,84.77 83.5,51.44 78.74,46.67 78.74,17.78 91.76,4.76 118.43,4.76 118.43,20.64 IC1.2
  Bottom 0.152: IC1.2 123.51,25.72 157.8,25.72 IC27.9 | IC3.19 57.15,88.9 v79.38,88.9
ACI-DATA0  (via drill 0.25)
  Top 0.152: IC2.18 56.2,54.93 56.2,58.1 57.15,59.05 57.15,62.23 | 57.15,62.23 57.15,91.44 IC3.18 | IC5.3 86.04,70.8 v86.04,62.55 | 57.15,62.23 v56.83,62.23
  Bottom 0.152: v86.04,62.55 85.72,62.23 v56.83,62.23
ACI-DATA1  (via drill 0.25)
  Top 0.152: IC2.16 61.28,54.93 61.28,58.1 62.23,59.05 62.23,91.44 IC3.16 | IC5.4 91.12,73.34 91.12,86.04 90.49,86.68 84.77,86.68 v84.77,90.17
  Bottom 0.152: v84.77,90.17 84.45,89.85 63.82,89.85 IC3.16
ACI-DATA2  (via drill 0.25)
  Top 0.152: IC2.14 67.31,55.88 67.31,91.44 IC3.14 | v88.27,73.98 84.14,78.11 v84.14,90.49
  Bottom 0.152: IC5.7 96.2,73.98 v88.27,73.98 | v84.14,90.49 83.82,90.81 67.94,90.81 IC3.14
ACI-DATA3  (via drill 0.25)
  Top 0.152: IC2.12 72.07,55.56 72.07,69.53 | 72.07,69.53 72.07,91.76 IC3.12 | IC5.8 100.01,72.07 v100.01,69.22 | 72.07,69.53 v71.75,69.53
  Bottom 0.152: v100.01,69.22 72.07,69.22 v71.75,69.53
ACI-DATA4  (via drill 0.25)
  Top 0.152: IC2.9 71.44,47.31 v71.44,50.8 | v75.88,51.44 v75.88,82.87 75.88,98.11 v76.52,98.74 | IC5.13 101.28,80.96 101.28,89.85 99.38,91.76 v99.38,95.89
  Bottom 0.152: v71.44,50.8 72.07,51.44 v75.88,51.44 | v75.88,82.87 75.25,83.5 72.71,83.5 IC3.9 | v99.38,95.89 99.06,96.2 89.53,96.2 87,98.74 v76.52,98.74
ACI-DATA5  (via drill 0.25)
  Top 0.152: v97.16,48.58 96.84,48.9 96.84,56.2 98.74,58.1 98.74,68.9 98.11,69.53 98.11,70.8 98.74,71.44 98.74,75.25 97.79,76.2 IC5.14 98.74,80.96 98.74,86.68 v96.84,88.58 | IC3.7 66.67,85.72 v66.67,87.95
  Bottom 0.152: IC2.7 67.63,45.4 86.68,45.4 89.85,48.58 v97.16,48.58 | v66.67,87.95 66.99,88.27 87,88.27 87.31,88.58 v96.84,88.58
ACI-DATA6  (via drill 0.25)
  Top 0.152: IC2.5 59.69,48.26 59.69,83.82 IC3.5 | IC5.17 89.53,80.64 v89.53,82.55
  Bottom 0.152: v89.53,82.55 89.22,82.23 67.31,82.23 66.04,83.5 62.55,83.5 IC3.5
ACI-DATA7  (via drill 0.25)
  Top 0.152: IC2.3 54.93,47.94 54.93,84.14 IC3.3 | IC5.18 86.68,80.96 v86.68,82.87
  Bottom 0.152: v86.68,82.87 82.87,86.68 57.47,86.68 IC3.3
ACO-DATA0  (via drill 0.25)
  Top 0.152: IC21.1 88.9,22.86 88.9,58.42 | IC18.1 88.9,58.42 | IC14.1 88.9,83.82 88.9,65.72 | 88.9,58.42 88.9,65.72 | IC28.11 160.34,107 171.45,107 SV1.1 | IC24.9 42.23,42.23 v42.23,44.45 | v53.98,45.09 54.61,45.72 54.61,71.12 IC12.2 | IC33.1 118.11,73.66 118.11,96.52 IC29.3 115.57,101.6 115.57,111.76 v116.2,112.39 | 88.9,65.72 86.68,65.72 86.68,62.23 86.36,61.91 85.09,61.91 IC5.2
  Bottom 0.152: v42.23,44.45 42.86,45.09 v53.98,45.09 | 86.68,73.98 87.31,74.61 113.35,74.61 115.57,72.39 IC33.1 | 86.68,73.98 IC5.2 | IC12.2 55.56,74.61 79.06,74.61 79.69,73.98 86.68,73.98 | IC28.11 151.76,112.39 v116.2,112.39
ACO-DATA1  (via drill 0.25)
  Top 0.152: IC29.4 123.19,96.52 123.19,73.66 IC33.4 v124.46,69.85 | IC21.4 96.84,22.54 96.84,47.94 96.52,48.26 96.52,56.52 97.79,57.78 IC18.4 96.84,60.64 v96.84,70.8 96.84,84.14 IC14.4 | v49.21,46.35 49.53,46.67 v49.53,64.14
  Bottom 0.152: SV1.2 167.64,69.85 v124.46,69.85 | IC24.11 36.2,41.27 35.56,41.27 34.61,40.32 28.89,40.32 28.26,40.96 28.26,45.09 37.78,45.09 38.1,45.4 48.26,45.4 v49.21,46.35 | v49.53,64.14 50.16,64.77 57.78,64.77 59.37,66.36 59.37,70.8 | 59.37,70.8 59.37,72.39 IC12.4 | 91.12,70.8 IC5.5 | 59.37,70.8 91.12,70.8 | 91.12,70.8 v96.84,70.8 122.87,70.8 IC33.4
ACO-DATA2  (via drill 0.25)
  Top 0.152: IC33.9 128.59,80.96 128.59,105.73 127.32,107 123.51,107 123.51,99.38 124.46,98.42 IC29.5 | SV1.3 165.1,67.31 165.1,75.25 v162.88,77.47 | IC21.9 101.92,30.16 101.92,66.36 IC18.9 102.87,68.26 101.92,69.22 v101.92,75.25 101.92,91.76 IC14.9 102.87,94.93 v103.19,95.25 | IC24.14 30.48,43.18 30.48,69.22 32.7,71.44 32.7,75.25 v32.38,75.56 | v63.18,75.88 63.5,75.56 IC12.6 | IC5.6 94.93,72.71 v94.93,75.25
  Bottom 0.152: v162.88,77.47 162.24,78.11 139.06,78.11 138.75,78.42 131.13,78.42 IC33.9 | v32.38,75.56 32.7,75.88 v63.18,75.88 94.3,75.88 v94.93,75.25 v101.92,75.25 | IC29.5 121.92,95.25 v103.19,95.25
ACO-DATA3  (via drill 0.25)
  Top 0.152: IC30.2 148.91,60.01 v148.91,61.91 147,63.82 147,73.98 v145.73,75.25 | IC21.12 94.3,30.16 94.3,66.36 | IC18.12 94.3,66.36 | v76.2,30.8 76.2,36.2 v75.25,37.15 76.52,38.42 76.52,51.75 76.2,52.07 76.2,73.66 v76.52,73.98 | IC5.9 102.55,72.71 v102.55,75.56 | 94.3,75.56 v95.57,76.83 | 94.3,66.36 94.3,75.56 | 120.97,79.06 IC33.12 | v120.97,76.83 120.97,79.06 | IC14.12 94.3,91.76 94.3,75.56 | 120.97,79.06 v120.97,94.61
  Bottom 0.152: v148.91,61.91 149.22,61.59 170.5,61.59 171.13,62.23 172.72,62.23 SV1.4 | IC24.1 27.3,37.47 47.62,37.47 47.94,37.78 64.77,37.78 65.41,37.15 v75.25,37.15 | v76.2,30.8 93.66,30.8 IC21.12 | IC12.8 70.17,73.98 v76.52,73.98 | 101.92,76.2 101.28,76.83 v95.57,76.83 | 101.92,76.2 v102.55,75.56 | 120.65,76.52 120.33,76.2 101.92,76.2 | 120.65,76.52 v120.97,76.83 | IC29.6 123.83,94.61 v120.97,94.61 | v145.73,75.25 144.46,76.52 120.65,76.52
ACO-DATA4  (via drill 0.25)
  Top 0.152: 74.61,30.16 IC25.9 | 74.61,30.16 74.61,53.02 74.93,53.34 74.93,57.15 | 74.93,57.15 74.93,78.74 IC12.11 | v76.2,9.84 74.61,11.43 74.61,30.16 | IC19.12 96.2,55.56 96.2,57.78 | 96.2,57.78 v96.2,81.6 96.2,100.97 95.25,101.92 IC15.12 | IC29.7 130.49,96.84 v130.49,61.59 | IC30.3 v152.72,58.1 | v96.84,57.78 96.2,57.78 | v75.25,57.15 74.93,57.15
  Bottom 0.152: IC22.1 89.22,9.84 v76.2,9.84 | IC5.12 101.28,81.6 v96.2,81.6 | 130.49,61.28 149.54,61.28 IC30.3 | 130.49,61.28 118.43,61.28 IC34.1 114.94,57.78 97.16,57.78 | 130.49,61.28 v130.49,61.59 | SV1.5 171.13,58.1 v152.72,58.1 | 97.16,57.78 v96.84,57.78 | v75.25,57.15 96.52,57.15 97.16,57.78
ACO-DATA5  (via drill 0.25)
  Top 0.152: v87.95,44.77 86.36,43.18 86.36,27.62 | 86.36,27.62 86.36,10.79 89.85,7.3 97.79,7.3 IC22.4 | v89.53,78.42 89.22,78.11 89.22,76.52 | 89.22,76.52 89.22,71.44 89.85,70.8 91.12,70.8 | 91.12,70.8 91.44,70.8 91.44,96.52 IC15.1 | IC25.11 69.53,30.16 v69.53,76.52 69.53,79.06 IC12.13 | v89.53,76.52 89.22,76.52 | v79.38,27.62 86.36,27.62 | IC34.4 123.19,60.96 123.19,68.26 v121.28,70.17 | 91.12,70.8 v91.12,70.17
  Bottom 0.152: IC34.4 126.05,58.1 151.76,58.1 153.35,59.69 IC30.4 155.26,61.28 164.15,61.28 165.74,59.69 172.72,59.69 SV1.6 | v87.95,44.77 IC19.1 | IC5.15 93.66,78.42 v89.53,78.42 | v69.53,76.52 v89.53,76.52 | v79.38,27.62 70.17,27.62 IC25.11 | v121.28,70.17 120.97,70.48 97.47,70.48 97.16,70.17 v91.12,70.17
ACO-DATA6  (via drill 0.25)
  Top 0.152: IC25.14 61.91,28.26 61.91,19.68 61.59,19.37 v61.59,18.73 | IC30.5 156.53,59.37 v156.53,56.83 | IC19.4 97.79,52.7 99.06,53.98 99.06,69.85 | 99.06,76.2 99.06,95.25 97.79,96.52 IC15.4 | 99.06,76.2 99.06,69.85 | 99.06,69.85 v98.74,69.85 | IC5.16 93.03,79.69 v93.03,76.83 | 99.06,76.2 v98.74,76.2 | IC22.9 101.6,17.78 v101.6,68.58
  Bottom 0.152: v61.59,18.73 61.91,18.41 100.97,18.41 IC22.9 | IC12.15 65.09,78.42 79.06,78.42 82.23,81.6 91.12,81.6 IC5.16 | v156.53,56.83 157.16,56.2 171.13,56.2 SV1.7 172.72,54.61 174.31,54.61 175.26,55.56 175.26,70.17 125.09,70.17 124.78,70.48 124.14,70.48 122.87,69.22 | IC34.9 127.64,69.22 122.87,69.22 | 101.6,69.22 100.97,69.22 100.33,69.85 v98.74,69.85 | 101.6,69.22 122.87,69.22 | v93.03,76.83 93.66,76.2 v98.74,76.2 | 101.6,69.22 v101.6,68.58
ACO-DATA7  (via drill 0.25)
  Top 0.152: IC28.12 IC28.5 157.48,96.52 157.48,60.96 IC30.6 158.75,57.78 v159.38,57.15 | v103.82,20.32 103.82,52.39 102.87,53.34 IC19.9 103.82,55.56 103.82,65.41 | IC25.1 57.78,23.5 v57.78,23.81 | 103.82,65.41 v103.5,65.72 | IC15.9 103.82,104.46 103.82,78.11 | 103.82,65.41 103.82,78.11 | 103.82,78.11 v103.5,78.11 | v124.78,57.47 122.87,59.37 122.87,66.36 IC34.12
  Bottom 0.152: SV1.8 172.72,57.15 v159.38,57.15 159.07,57.47 v124.78,57.47 | IC12.17 60.33,78.11 79.38,78.11 79.69,78.42 83.5,78.42 IC5.19 87.31,77.79 103.19,77.79 v103.5,78.11 | IC22.12 96.84,14.92 103.19,14.92 103.82,15.56 103.82,20 | v103.82,20.32 103.82,20 | v57.78,23.81 58.1,23.5 86.36,23.5 89.85,20 103.82,20 | IC34.12 120.33,65.72 v103.5,65.72
ALU0  (via drill 0.25)
  Top 0.152: v11.75,37.47 11.43,37.78 11.43,46.99 | 11.43,46.99 11.43,54.61 X1.C16 | 154.62,58.1 155.26,58.74 v155.26,62.23 | 154.62,58.1 IC32.14 | v153.35,102.87 154.62,101.6 154.62,71.12 154.31,70.8 154.31,68.58 154.62,68.26 154.62,58.1 | v4.76,46.99 11.43,46.99
  Bottom 0.152: IC26.11 35.24,27.62 23.81,27.62 18.41,33.02 18.41,37.47 v11.75,37.47 | IC8.1 9.84,59.69 8.89,58.74 8.89,55.88 X1.C16 | v155.26,62.23 158.43,65.41 161.93,65.41 IC30.9 | v153.35,102.87 150.18,102.87 150.18,105.73 148.91,107 133.67,107 IC29.9 128.59,108.9 24.45,108.9 13.65,98.11 2.22,98.11 2.22,49.53 v4.76,46.99
ALU1  (via drill 0.25)
  Top 0.152: IC26.10 38.42,30.16 38.42,39.05 39.05,39.69 39.05,40.32 38.42,40.96 38.42,43.81 39.05,44.45 39.05,45.4 38.42,46.04 38.42,51.75 40.32,53.66 40.32,55.88 v38.42,57.78 38.1,58.1 38.1,104.78 v40.96,107.63 | IC32.2 147.32,48.26 v147.32,61.91 | IC29.10 135.89,99.06 v135.89,69.22
  Bottom 0.152: v38.42,57.78 38.1,58.1 28.26,58.1 | IC8.2 28.26,58.1 | X1.C17 23.5,58.42 23.81,58.1 28.26,58.1 | 148.59,63.18 151.13,65.72 159.7,65.72 IC30.10 | 148.59,63.18 v147.32,61.91 | v135.89,69.22 141.92,63.18 148.59,63.18 | v40.96,107.63 127.32,107.63 IC29.10
ALU2  (via drill 0.25)
  Top 0.152: IC26.9 42.86,30.16 v42.86,60.96 43.18,61.28 43.18,100.65 v52.07,109.54
  Bottom 0.152: v42.86,60.96 42.55,61.28 30.8,61.28 | IC8.3 30.8,61.28 | IC28.14 147,109.54 v52.07,109.54 | X1.C18 10.48,61.28 30.8,61.28
ALU3  (via drill 0.25)
  Top 0.152: IC6.12 120.65,43.18 120.65,53.34 120.33,53.66 120.33,56.83 118.43,58.74 118.43,94.93 120.33,96.84 120.33,100.01 115.89,104.46 115.89,106.36 116.84,107.31 | 116.84,107.31 147.64,107.31 147.64,102.23 148.59,101.28 IC28.2 | v15.24,68.58 15.24,99.69 28.57,113.03 116.84,113.03 116.84,107.31
  Bottom 0.152: v15.24,68.58 X1.C19
BDATA0  (via drill 0.25)
  Top 0.152: IC21.2 91.76,22.54 91.76,58.74 | IC18.2 91.76,58.74 | IC14.2 91.76,84.14 91.76,58.74 | 25.08,93.66 IC10.18 | 25.08,93.66 25.08,103.19 RN1.2 | v26.04,81.6 25.08,82.55 25.08,93.66 | V2.2 29.84,8.26 29.84,6.99 34.92,1.91 38.42,1.91 38.42,26.35 40.32,28.26 40.32,40.96 IC24.10 40.96,43.5 v40.96,57.78 40.96,60.01 38.42,62.55 38.42,77.79 v38.73,78.11 | v53.98,56.83 53.34,57.47 IC13.2
  Bottom 0.152: IC35.5 122.87,86.68 113.03,86.68 112.71,86.36 106.05,86.36 105.73,86.68 94.61,86.68 93.03,85.09 IC14.2 | IC12.18 54.29,81.6 38.42,81.6 | v26.04,81.6 38.42,81.6 | IC13.2 52.07,58.42 51.44,58.42 50.48,57.47 41.27,57.47 v40.96,57.78 | 38.42,81.6 38.42,78.11 v38.73,78.11 | IC18.2 94.3,61.28 95.57,61.28 96.2,60.64 96.2,57.47 75.88,57.47 75.56,57.78 64.45,57.78 63.5,56.83 v53.98,56.83
BDATA1  (via drill 0.25)
  Top 0.152: IC21.5 99.38,22.54 99.38,58.74 | IC18.5 99.38,58.74 | IC14.5 99.38,84.14 99.38,58.74 | v60.33,61.28 60.01,61.59 60.01,62.87 | 60.01,76.52 60.01,79.06 IC12.16 | 60.01,76.52 60.01,62.87 | IC10.17 27.62,93.66 27.62,103.19 26.99,103.82 | V2.3 33.34,7.3 35.24,7.3 35.24,18.73 33.34,20.64 33.34,35.24 35.56,37.47 36.2,37.47 36.2,39.37 35.24,40.32 | 35.24,40.32 34.29,41.27 IC24.12 | 26.99,103.82 28.89,105.73 35.56,105.73 35.56,79.38 35.88,79.06 v35.88,76.52 35.88,72.07 33.34,69.53 33.34,49.85 35.24,47.94 35.24,40.32 | 26.99,103.82 RN1.3 | v60.33,76.52 60.01,76.52 | 60.01,62.87 v60.33,62.87
  Bottom 0.152: IC14.5 101.92,83.5 117.79,83.5 IC35.3 | IC13.4 60.01,61.28 v60.33,61.28 | v35.88,76.52 v60.33,76.52 | IC18.5 101.92,58.1 103.19,58.1 103.82,58.74 103.82,63.18 60.64,63.18 v60.33,62.87
BDATA2  (via drill 0.25)
  Top 0.152: 30.16,93.66 IC10.16 | 30.16,93.66 30.16,103.19 RN1.4 | IC12.14 65.72,80.33 v65.72,82.55 | v30.48,82.87 30.16,83.19 30.16,93.66 | V2.4 32.7,10.48 32.7,40.96 IC24.13 30.8,42.86 30.8,60.64 v32.07,61.91 | 100.33,61.91 v100.01,61.59 | 100.33,61.91 IC18.10 100.33,68.26 101.28,69.22 101.28,75.56 101.6,75.88 101.6,91.44 IC14.10 | IC21.10 101.28,30.16 101.28,60.96 100.33,61.91 | v46.35,61.59 v46.35,82.55
  Bottom 0.152: v65.72,82.55 65.09,83.19 46.35,83.19 | 46.35,83.19 30.8,83.19 v30.48,82.87 | IC14.10 101.92,94.3 117.79,94.3 IC35.14 | v100.01,61.59 93.98,61.59 93.66,61.28 87.31,61.28 87,61.59 65.41,61.59 IC13.6 61.28,61.91 57.47,61.91 56.83,61.28 47.94,61.28 47.62,61.59 v46.35,61.59 32.38,61.59 v32.07,61.91 | v46.35,82.55 46.35,83.19
BDATA3  (via drill 0.25)
  Top 0.152: IC13.8 68.9,60.01 v68.9,64.45 | IC21.13 93.98,30.48 93.98,66.04 IC18.13 93.66,68.26 93.66,82.23 | V2.5 38.1,10.16 38.1,39.69 v38.42,40.01 | RN1.5 32.7,103.19 32.7,93.66 IC10.15 33.02,91.44 v33.02,82.55 | 93.66,82.23 v93.34,81.92 | 93.66,82.23 93.66,91.76 93.03,92.39 | 93.03,92.39 v95.57,94.93 | 93.03,92.39 IC14.13 | v44.45,82.23 v44.45,40.01
  Bottom 0.152: v68.9,64.45 70.17,65.72 91.12,65.72 IC18.13 | IC24.15 28.57,40.01 v38.42,40.01 v44.45,40.01 | 73.03,81.92 IC12.12 | v93.34,81.92 73.03,81.92 | IC35.12 122.87,94.3 121.6,94.3 121.28,93.98 120.02,93.98 119.38,94.61 95.89,94.61 v95.57,94.93 | v33.02,82.55 33.66,81.92 44.45,81.92 | 73.03,81.92 44.45,81.92 | 44.45,81.92 v44.45,82.23
BDATA4  (via drill 0.25)
  Top 0.152: IC10.14 35.24,93.66 35.24,103.19 RN1.6 | IC15.13 92.08,106.05 92.08,107.63 | v92.08,108.27 92.08,107.63 | IC12.9 71.12,69.53 v70.48,68.9 70.17,68.58 | V2.9 40.01,17.14 v40.01,19.37 | v68.58,19.68 70.17,21.27 70.17,28.26 IC25.10 69.85,30.48 69.85,68.26 70.17,68.58 | IC22.2 91.44,10.16 v91.44,19.37 91.44,52.7 v91.12,53.02 | v121.6,49.85 IC36.5 | v93.03,50.8 92.71,51.12 IC19.13 | 92.08,107.63 67.63,107.63 67.63,103.19 68.26,102.55 70.17,102.55 70.17,105.09 70.8,105.73 72.07,105.73 72.07,99.38 70.17,97.47 70.17,68.58
  Bottom 0.152: v92.08,108.27 38.42,108.27 RN1.6 | IC13.11 72.07,68.9 v70.48,68.9 | v40.01,19.37 40.32,19.68 v68.58,19.68 91.12,19.68 v91.44,19.37 | v91.12,53.02 IC19.13 | v121.6,49.85 112.71,49.85 111.76,50.8 v93.03,50.8
BDATA5  (via drill 0.25)
  Top 0.152: V2.10 37.78,17.46 37.78,91.76 | IC10.13 37.78,91.76 | 37.78,91.76 37.78,103.19 RN1.7 40.32,107.63 40.32,107.95 42.55,110.17 62.23,110.17 62.23,95.89 64.77,93.34 64.77,71.12 | IC22.5 111.76,20.32 111.76,34.92 | v111.76,45.4 111.76,34.92 | IC25.12 65.41,29.84 65.41,33.02 64.77,33.66 64.77,50.16 | 64.77,71.12 64.77,65.72 | 64.77,65.72 64.77,50.16 | IC12.7 64.77,71.12 | 64.77,65.72 v65.09,65.72 | IC19.2 92.39,47.31 v92.39,50.16 | 64.77,50.16 v65.41,50.16 | IC15.2 91.12,99.38 91.12,106.36 90.49,107 83.5,107 83.5,85.41 83.82,85.09 v83.82,50.48 | 111.76,34.92 107.95,34.92 v107.95,50.16
  Bottom 0.152: v111.76,45.4 117.79,45.4 IC36.3 | IC13.13 66.99,65.72 v65.09,65.72 | v65.41,50.16 71.75,50.16 72.07,50.48 v83.82,50.48 92.08,50.48 v92.39,50.16 v107.95,50.16
BDATA6  (via drill 0.25)
  Top 0.152: IC12.5 v60.96,69.85 | RN1.8 40.32,103.19 40.32,93.66 IC10.12 40.64,91.44 40.64,71.44 v42.23,69.85 | v95.89,102.23 IC15.5 | v60.64,18.73 61.28,18.1 62.23,18.1 62.23,27.94 IC25.13 | IC22.10 99.06,17.78 v99.06,19.05 99.06,47.94 v98.74,48.26 | IC36.14 120.02,53.98 v120.02,48.58 | v46.99,69.53 46.99,32.7 47.31,32.38 v47.31,18.73
  Bottom 0.152: v60.96,69.85 IC13.15 | v95.89,102.23 95.57,101.92 49.85,101.92 46.04,105.73 40.96,105.73 RN1.8 | IC12.5 59.37,73.98 55.56,73.98 54.29,72.71 54.29,69.85 46.99,69.85 | v42.23,69.85 46.99,69.85 | V2.11 32.7,14.92 31.43,14.92 30.8,15.56 30.8,18.73 v47.31,18.73 v60.64,18.73 61.28,19.37 67.94,19.37 68.58,18.73 98.74,18.73 v99.06,19.05 | v98.74,48.26 100.01,46.99 IC19.5 101.92,48.58 105.73,48.58 106.05,48.26 112.39,48.26 112.71,48.58 v120.02,48.58 | v46.99,69.53 46.99,69.85
BDATA7  (via drill 0.25)
  Top 0.152: IC25.15 59.05,28.57 59.05,22.86 59.37,22.54 v59.37,18.1 | IC19.10 100.65,54.93 v100.65,56.83 | IC36.12 v121.6,57.47 | IC10.11 40.96,93.66 40.96,103.19 RN1.9 | IC12.3 56.83,73.34 56.83,86.04 v53.98,88.9 | IC15.10 100.33,107 103.19,107 104.14,106.05 104.14,57.47 v104.46,57.15 104.46,53.66 106.68,51.44 106.68,20.95 104.14,18.41 104.14,15.88 101.6,13.34 101.6,12.38 95.89,12.38 94.61,13.65 94.61,14.61 IC22.13
  Bottom 0.152: V2.12 33.34,18.1 v59.37,18.1 91.12,18.1 IC22.13 | v100.65,56.83 101.28,57.47 104.46,57.47 | v121.6,57.47 104.46,57.47 | IC13.17 58.42,70.8 57.47,70.8 IC12.3 | IC15.10 94.3,99.38 54.29,99.38 51.75,96.84 51.75,91.12 | 51.75,91.12 43.5,91.12 IC10.11 | 51.75,91.12 v53.98,88.9 | v104.46,57.15 104.46,57.47
BDATA8  (via drill 0.25)
  Top 0.152: RN2.2 23.18,96.84 23.18,84.14 23.5,83.82 23.5,80.64 IC11.18 25.08,79.06 25.08,71.44 25.72,70.8 25.72,33.34 26.04,33.02 26.04,32.07 25.4,31.43 25.4,7.94 v26.04,7.3
  Bottom 0.152: V1.2 59.37,7.3 v26.04,7.3
BDATA9  (via drill 0.25)
  Top 0.152: RN2.3 25.72,96.84 25.72,84.14 26.67,83.19 IC11.17 25.72,79.06 25.72,71.44 27.62,69.53 27.62,57.15 27.94,56.83 27.94,45.4 v29.84,43.5 | V1.3 64.45,9.84 64.45,30.8 64.14,31.11 64.14,33.02 64.45,33.34 64.45,43.18 v64.14,43.5
  Bottom 0.152: v29.84,43.5 v64.14,43.5
BDATA10  (via drill 0.25)
  Top 0.152: IC11.16 28.26,80.96 28.26,96.84 RN2.4 | V1.4 68.9,6.03 77.47,6.03 77.47,53.98 78.74,55.24 v78.74,100.65
  Bottom 0.152: v78.74,100.65 77.79,101.6 49.53,101.6 48.58,102.55 33.97,102.55 RN2.4
BDATA11  (via drill 0.25)
  Top 0.152: IC11.15 31.11,80.64 31.11,83.82 30.8,84.14 30.8,96.84 RN2.5 | V1.5 69.53,7.94 69.53,7.3 70.48,6.35 77.15,6.35 77.15,54.29 78.11,55.24 v78.11,100.33
  Bottom 0.152: v78.11,100.33 77.79,100.65 34.61,100.65 RN2.5
BDATA12  (via drill 0.25)
  Top 0.152: RN2.6 33.34,96.84 33.34,84.14 33.66,83.82 33.66,80.64 IC11.14 34.29,77.47 33.02,76.2 33.02,39.69 v33.97,38.73 | V1.9 72.07,17.46 72.07,38.42 v71.75,38.73
  Bottom 0.152: v71.75,38.73 48.9,38.73 48.58,38.42 36.2,38.42 35.88,38.73 v33.97,38.73
BDATA13  (via drill 0.25)
  Top 0.152: IC11.13 36.2,80.64 36.2,83.82 35.88,84.14 35.88,96.84 RN2.7 | V1.10 72.07,13.02 72.07,7.3 72.71,6.67 76.83,6.67 76.83,54.61 77.47,55.24 v77.47,100.01
  Bottom 0.152: v77.47,100.01 39.05,100.01 RN2.7
BDATA14  (via drill 0.25)
  Top 0.152: IC11.12 38.42,80.96 38.42,95.89 39.37,96.84 RN2.8 | V1.11 64.77,17.78 v64.77,31.43 | v46.67,32.07 45.72,33.02 v45.72,78.11
  Bottom 0.152: v64.77,31.43 64.14,32.07 v46.67,32.07 | v45.72,78.11 45.4,78.42 40.96,78.42 IC11.12
BDATA15  (via drill 0.25)
  Top 0.152: IC11.11 42.86,80.96 42.86,96.84 RN2.9 | V1.12 62.55,15.56 62.55,11.75 61.28,10.48 45.09,10.48 v45.09,79.06
  Bottom 0.152: v45.09,79.06 44.13,80.01 IC11.11
BR-COND  (via drill 0.25)
  Top 0.152: v16.83,4.45 3.49,17.78 3.49,73.66 4.76,74.93 10.16,74.93 X1.C24
  Bottom 0.152: IC27.8 163.83,23.18 163.51,23.18 162.24,21.91 162.24,12.38 138.11,12.38 130.18,4.45 v16.83,4.45
C/SHIFT  (via drill 0.25)
  Top 0.152: IC28.3 152.72,99.38 152.72,104.46 IC28.13 154.31,106.05 154.31,106.36 155.26,107.31 172.72,107.31 172.72,54.61 SV1.9 171.45,45.4 162.88,45.4 160.02,42.55 160.02,35.56 IC9.5 | IC26.12 34.61,28.89 34.61,23.18 35.88,21.91 35.88,12.06 v37.47,10.48 | v120.97,11.75 122.87,13.65 122.87,26.35 120.97,28.26 120.97,40.32 IC6.13
  Bottom 0.152: v37.47,10.48 115.89,10.48 117.16,11.75 v120.97,11.75 | IC9.5 155.26,37.78 141.6,37.78 141.29,38.1 123.19,38.1 IC6.13
CO/BO
  Top 0.152: IC7.1 149.86,7.62 149.86,6.99 160.34,6.99 160.34,20.64 IC27.6
DATA0  (via drill 0.25)
  Top 0.152: v13.02,83.5 12.06,82.55 12.06,66.36 10.48,64.77 5.08,64.77 X1.A19
  Bottom 0.152: IC10.2 20,83.5 v13.02,83.5
DATA1  (via drill 0.25)
  Top 0.152: v12.7,84.14 11.75,83.19 11.75,68.58 10.48,67.31 5.08,67.31 X1.A20
  Bottom 0.152: IC10.3 22.54,86.68 15.24,86.68 v12.7,84.14
DATA2  (via drill 0.25)
  Top 0.152: IC10.4 27.62,84.14 v27.62,71.12
  Bottom 0.152: v27.62,71.12 26.35,69.85 6.35,69.85 X1.A21
DATA3  (via drill 0.25)
  Top 0.152: IC10.5 29.84,84.45 29.84,81.28 30.16,80.96 v30.16,74.3
  Bottom 0.152: v30.16,74.3 17.78,74.3 16.51,73.03 11.11,73.03 10.48,72.39 6.35,72.39 X1.A22
DATA4  (via drill 0.25)
  Top 0.152: IC10.6 32.38,84.45 32.38,81.28 32.7,80.96 v32.7,76.83
  Bottom 0.152: v32.7,76.83 31.75,75.88 11.43,75.88 10.48,74.93 6.35,74.93 X1.A23
DATA5  (via drill 0.25)
  Top 0.152: IC10.7 35.24,84.14 v35.24,78.74
  Bottom 0.152: v35.24,78.74 34.92,78.42 11.43,78.42 10.48,77.47 6.35,77.47 X1.A24
DATA6
  Bottom 0.152: IC10.8 34.92,87 18.41,87 15.24,90.17 4.76,90.17 3.49,88.9 3.49,78.74 X1.A25
DATA7
  Bottom 0.152: IC10.9 37.78,83.5 20.64,83.5 20.32,83.19 13.65,83.19 13.34,82.87 12.7,82.87 11.75,83.82 11.75,87.63 4.76,87.63 3.81,86.68 3.81,81.28 X1.A26
DATA8  (via drill 0.25)
  Top 0.152: IC11.2 20.64,73.34 20.64,81.92 v20.32,82.23
  Bottom 0.152: v20.32,82.23 10.79,82.23 10.48,82.55 6.35,82.55 X1.A27
DATA9  (via drill 0.25)
  Top 0.152: IC11.3 22.86,73.66 v22.86,80.64
  Bottom 0.152: v22.86,80.64 20.64,82.87 13.97,82.87 13.65,82.55 12.38,82.55 11.43,83.5 11.43,85.09 6.35,85.09 X1.A28
DATA10  (via drill 0.25)
  Top 0.152: v14.61,72.39 13.97,73.03 13.97,84.45 10.79,87.63 5.08,87.63 X1.A29
  Bottom 0.152: IC11.4 24.45,70.17 16.83,70.17 v14.61,72.39
DATA11  (via drill 0.25)
  Top 0.152: IC11.5 27.94,73.66 27.94,86.04 v26.35,87.63
  Bottom 0.152: v26.35,87.63 22.86,91.12 12.06,91.12 10.48,92.71 6.35,92.71 X1.A30
DATA12  (via drill 0.25)
  Top 0.152: IC11.6 28.26,68.9 v28.26,57.47 | v13.97,57.78 13.02,56.83 13.02,26.67 10.48,24.13 7.62,24.13 X1.B3
  Bottom 0.152: v28.26,57.47 27.94,57.78 v13.97,57.78
DATA13  (via drill 0.25)
  Top 0.152: v17.78,33.97 v17.78,70.8
  Bottom 0.152: IC11.7 32.7,73.98 30.8,73.98 30.48,73.66 29.84,73.66 29.53,73.98 21.27,73.98 20,72.71 20,70.8 v17.78,70.8 | v17.78,33.97 10.48,26.67 8.89,26.67 X1.B4
DATA14  (via drill 0.25)
  Top 0.152: IC11.8 35.88,71.44 v35.88,66.04 | v13.97,65.72 12.7,64.45 12.7,31.43 10.48,29.21 7.62,29.21 X1.B5
  Bottom 0.152: v35.88,66.04 35.56,65.72 v13.97,65.72
DATA15  (via drill 0.25)
  Top 0.152: v13.02,73.66 12.38,73.03 12.38,33.66 10.48,31.75 7.62,31.75 X1.B6
  Bottom 0.152: IC11.9 36.83,74.93 17.78,74.93 16.51,73.66 v13.02,73.66
GND  (via drill 0.25)
  Top 0.152: C3.2 88.58,91.12 88.58,101.92 C39.2 | IC18.7 104.46,60.64 104.46,71.44 IC5.10 104.46,73.34 104.46,77.47 | 110.81,90.49 107,86.68 | 107,86.68 IC14.7 104.46,84.14 104.46,77.47 | 110.81,90.49 111.76,90.49 C22.2 | 110.81,90.49 105.41,95.89 IC15.7 | C2.2 88.58,53.02 88.58,63.82 C15.2 | IC19.7 106.36,46.04 106.36,38.1 104.78,36.51 104.78,34.92 IC20.10 104.46,33.34 104.46,22.54 IC21.7 | C35.2 88.58,14.92 88.58,25.72 C33.2 | C14.2 114.3,43.81 110.81,47.31 110.81,51.12 C12.2 113.35,53.66 113.35,63.82 C29.2 113.03,66.04 113.03,80.64 107,86.68 | C10.2 140.02,91.76 140.02,99.38 C28.2 145.1,104.46 145.1,106.36 145.73,107 147,107 147,102.23 146.05,101.28 IC28.1 | IC31.10 162.88,86.04 162.88,96.2 | 162.88,96.2 162.88,96.84 IC28.8 | IC28.15 150.18,103.82 150.18,96.84 150.81,96.2 153.67,96.2 IC28.4 | IC28.10 158.75,102.87 IC28.6 158.75,96.2 162.88,96.2 | IC7.4 IC7.5 IC7.10 | 162.88,20.64 161.29,19.05 IC7.9 161.29,11.43 IC7.7 166.05,6.67 166.05,3.81 PWR.K | 162.88,20.64 IC27.7 | IC9.7 162.88,33.34 162.88,20.64 | IC32.12 IC32.13 | IC32.11 IC32.6 | IC32.8 161.29,49.53 161.29,50.16 | IC32.10 161.29,50.16 | 164.78,58.74 IC30.8 | 164.78,58.74 164.78,53.66 161.29,50.16 | IC37.10 164.78,71.44 164.78,58.74 | IC4.4 IC4.5 IC4.10 | IC4.7 129.54,11.43 IC4.9 129.54,19.05 IC1.7 | IC22.7 113.35,8.89 113.35,9.21 115.25,11.11 115.25,13.02 | C6.2 115.25,13.02 | 131.13,71.44 131.13,60.64 IC34.7 131.13,58.74 131.13,46.04 | IC33.7 131.13,71.44 | 131.13,84.14 IC35.8 | 131.13,71.44 131.13,84.14 | C7.2 145.1,14.92 145.1,25.72 C32.2 145.1,27.62 145.1,38.42 C26.2 146.05,45.72 | IC32.3 148.59,49.53 IC32.15 | IC32.1 146.05,45.72
  Top 0.152: 142.56,51.12 C31.2 | 142.56,51.12 142.56,49.21 146.05,45.72 | C25.2 142.56,63.82 142.56,51.12 | IC6.7 131.13,35.24 131.13,46.04 | IC36.8 131.13,46.04 | IC29.8 131.13,96.84 131.13,84.14 | C1.2 115.25,25.72 115.25,13.02 | C37.2 52.39,17.46 52.39,25.72 C13.2 | X1.A1 X1.B1 X1.C1 | IC10.10 40.96,84.14 40.96,73.34 IC11.10 42.86,71.44 42.86,61.91 41.91,60.96 IC8.8 IC16.11 IC16.10 | IC16.13 IC16.8 | IC16.6 IC16.15 IC8.4 | V2.7 40.96,9.84 v40.96,12.38 40.96,20 | 40.96,20.64 40.96,20 | IC26.8 40.96,20.64 | 40.96,20 IC26.7 | IC24.8 40.96,33.34 40.96,20.64 | IC16.17 IC16.4 27.62,46.04 27.62,35.24 IC24.2 | C20.2 20.64,27.62 20.64,30.16 | 20.64,30.16 20.64,38.42 C36.2 21.59,42.55 | 21.59,42.55 IC16.2 | C4.2 17.46,51.12 17.46,34.61 17.14,34.29 17.14,33.66 20.64,30.16 | C8.2 22.23,64.14 22.23,62.87 22.54,62.55 22.54,57.47 20,54.93 20,49.85 18.1,47.94 18.1,46.04 21.59,42.55 | IC2.10 74.3,47.62 74.3,53.34 74.61,53.66 74.61,58.74 IC13.10 72.71,60.64 72.71,73.34 | IC17.10 74.61,95.57 74.61,86.04 IC3.10 72.71,84.14 72.71,73.34 | C24.2 79.06,76.52 79.06,74.61 81.28,72.39 IC5.1 | IC12.10 72.71,73.34 | V1.7 72.71,9.84 72.71,20.64 | IC25.8 72.71,20.64 | 72.71,20.64 72.71,33.34 IC23.10 v73.66,39.37 | C34.2 48.58,39.69 48.58,48.58 49.21,49.21 49.21,51.12 C18.2 49.21,53.02 49.21,63.5 48.26,64.45 C5.2 49.21,65.72 49.21,76.52 | X1.A32 X1.B32 X1.C32 | C19.2 17.46,78.42 17.46,89.22 C21.2 16.51,93.03 v16.19,93.34 | C9.2 49.21,76.52 | 49.21,89.22 C38.2 | 49.21,76.52 49.21,89.22 | C11.2 49.21,100.65 49.21,89.22 | v104.78,77.47 104.46,77.47
  Bottom 0.152: IC15.7 110.49,102.87 C30.2 | C22.2 C3.2 | C12.2 C2.2 | IC20.10 110.49,39.37 C14.2 | 110.17,26.35 110.49,26.67 C1.2 | 110.17,26.35 IC21.7 | C33.2 87.95,26.35 110.17,26.35 | IC29.8 IC28.1 147.64,96.2 155.26,96.2 | 155.26,96.2 IC28.4 | 155.26,96.2 157.16,96.2 IC28.6 | IC7.9 IC7.10 156.21,13.97 C7.2 137.16,13.97 IC4.7 | IC32.12 IC32.11 IC32.10 | SV1.10 167.64,46.99 IC32.8 | IC4.9 IC4.10 125.41,18.1 123.51,18.1 IC4.12 IC4.13 116.84,13.97 C6.2 | IC27.12 IC27.13 148.59,26.67 C32.2 | IC1.11 126.05,27.62 129.86,27.62 131.13,28.89 131.13,34.29 IC6.7 | IC36.8 IC32.1 147.64,48.58 149.54,48.58 IC32.3 | IC32.13 152.08,53.02 150.18,53.02 IC32.15 | 25.72,12.38 C16.2 | 25.72,12.38 25.72,10.48 17.46,10.48 X1.C1 | C37.2 54.29,12.38 v40.96,12.38 25.72,12.38 | IC8.5 IC8.4 | IC16.8 35.24,48.58 33.34,48.58 IC16.6 30.16,45.4 25.08,45.4 | IC16.11 40.32,56.2 38.42,56.2 IC16.13 | IC24.2 28.26,32.7 30.16,32.7 IC24.4 33.34,35.88 40.32,35.88 IC24.8 | 25.08,45.4 IC16.4 | 25.08,45.4 23.18,45.4 IC16.2 | C23.2 C27.2 v104.78,77.47 C24.2 C9.2 C19.2 | IC5.1 IC12.10 | C17.2 v73.66,39.37 C34.2 C36.2 | X1.C32 13.34,93.34 v16.19,93.34
INV-IN0  (via drill 0.25)
  Top 0.152: IC23.18 53.34,44.45 IC2.2 52.39,47.94 52.39,55.88 v51.75,56.52 51.75,63.18 53.66,65.09 | 53.66,65.09 v53.98,65.41 | IC37.18 147,80.96 147,83.19 | 147,83.19 147,89.53 146.05,90.49 IC31.18 | IC17.18 54.61,102.87 54.61,92.08 53.34,90.81 IC3.2 52.39,84.14 52.39,66.36 53.66,65.09 | v145.73,83.19 147,83.19
  Bottom 0.152: IC16.18 26.04,56.52 v51.75,56.52 | v53.98,65.41 IC13.18 | IC20.18 86.04,40.32 79.69,40.32 79.38,40.01 57.78,40.01 IC23.18 | v145.73,83.19 87.31,83.19 83.5,87 55.56,87 53.66,85.09 IC3.2
INV-IN1  (via drill 0.25)
  Top 0.152: IC37.16 152.08,80.96 152.08,91.76 IC31.16 | v60.64,44.77 60.96,44.45 IC23.16 | 57.47,56.83 v56.83,57.47 | 57.47,56.83 57.47,47.94 IC2.4 | 57.47,84.14 IC3.4 | 57.47,56.83 57.47,64.14 | 57.47,64.14 57.47,84.14 | 57.47,64.14 v57.78,64.14 | IC17.16 54.93,98.11 54.93,95.57 57.47,93.03 57.47,84.14
  Bottom 0.152: IC2.4 v60.64,44.77 70.8,44.77 71.75,43.81 88.58,43.81 88.9,44.13 93.98,44.13 93.98,43.18 IC20.16 | IC16.16 27.62,56.2 26.35,56.2 25.08,54.93 25.08,53.02 23.81,53.02 23.18,53.66 23.18,56.83 51.12,56.83 51.75,57.47 v56.83,57.47 | v57.78,64.14 IC13.16 | IC31.16 154.31,95.89 161.29,95.89 162.24,96.84 162.24,100.65 144.46,100.65 143.83,101.28 114.62,101.28 112.08,103.82 102.55,103.82 101.28,105.09 101.28,107 63.82,107 IC17.16
INV-IN2  (via drill 0.25)
  Top 0.152: IC37.14 157.16,80.96 157.16,91.76 IC31.14 154.94,93.98 v154.94,106.05 | IC16.14 35.24,55.56 v35.24,57.47 | IC2.6 62.23,48.26 v62.23,58.1 62.55,58.42 62.55,68.9 | IC3.6 62.55,84.14 62.55,68.9 | IC23.14 65.41,42.55 v65.41,45.4 | 62.55,68.9 v62.87,68.9 | IC13.14 66.99,68.26 66.99,73.34 65.09,75.25 65.09,103.19 IC17.14 66.04,106.68 v69.53,110.17
  Bottom 0.152: v35.24,57.47 35.56,57.15 50.8,57.15 51.75,58.1 v62.23,58.1 | IC2.6 63.82,46.99 v65.41,45.4 65.72,45.09 71.12,45.09 72.07,44.13 88.27,44.13 88.58,44.45 94.3,44.45 94.93,43.81 95.25,43.81 95.89,43.18 96.52,43.18 IC20.14 | IC13.14 64.45,68.9 v62.87,68.9 | v154.94,106.05 150.81,110.17 v69.53,110.17
INV-IN3  (via drill 0.25)
  Top 0.152: IC2.8 67.63,47.94 67.63,68.9 | 67.63,68.9 67.63,84.14 IC3.8 69.53,86.04 69.53,97.47 70.48,98.42 70.48,103.5 IC17.12 | IC16.12 38.1,53.34 38.1,45.09 v38.42,44.77 | 67.63,68.9 v67.94,68.9 | IC31.12 162.24,91.76 162.24,80.96 IC37.12 162.24,79.06 162.24,72.07 162.88,71.44 v162.88,53.02 | v70.48,44.13 71.12,43.5 IC23.12
  Bottom 0.152: v38.42,44.77 39.37,43.81 54.61,43.81 57.15,46.35 | 57.15,46.35 57.47,46.67 57.47,48.58 66.99,48.58 IC2.8 | IC13.12 69.53,68.9 v67.94,68.9 | IC23.12 72.71,40.32 79.06,40.32 82.23,43.5 87.95,43.5 89.22,42.23 89.22,40.32 101.28,40.32 IC20.12 105.41,44.45 109.86,44.45 110.17,44.13 157.16,44.13 157.16,47.31 v162.88,53.02 | 57.15,46.35 59.37,44.13 v70.48,44.13
INV-IN4  (via drill 0.25)
  Top 0.152: IC31.9 160.34,84.14 160.34,79.06 160.97,78.42 160.97,72.71 IC37.9 162.24,71.44 v162.24,53.34 | IC3.11 71.75,94.61 71.75,95.89 71.44,96.2 | IC16.9 40.32,47.94 v40.32,48.9 | 73.34,50.16 73.66,50.48 IC2.11 | 73.34,50.16 v72.07,48.9 72.07,40.96 71.12,40.01 v71.12,38.1 IC23.9 | IC13.9 70.17,58.74 70.17,53.34 73.34,50.16 | IC20.9 102.55,34.61 v102.55,37.47 | 71.44,96.2 74.61,99.38 77.15,99.38 77.15,55.88 v76.83,55.56 | 71.44,96.2 IC17.9